# Altium PCB RPI-SENSORS.PcbDoc
Units mil, origin at the board's own origin, x right, y up, seen from the top; angles counter-clockwise.
Board outline 2228.74 x 2503.46 mil, 2 copper layers (Top Layer, Bottom Layer); 22 components, 20 nets, 103 pads, 0 vias.
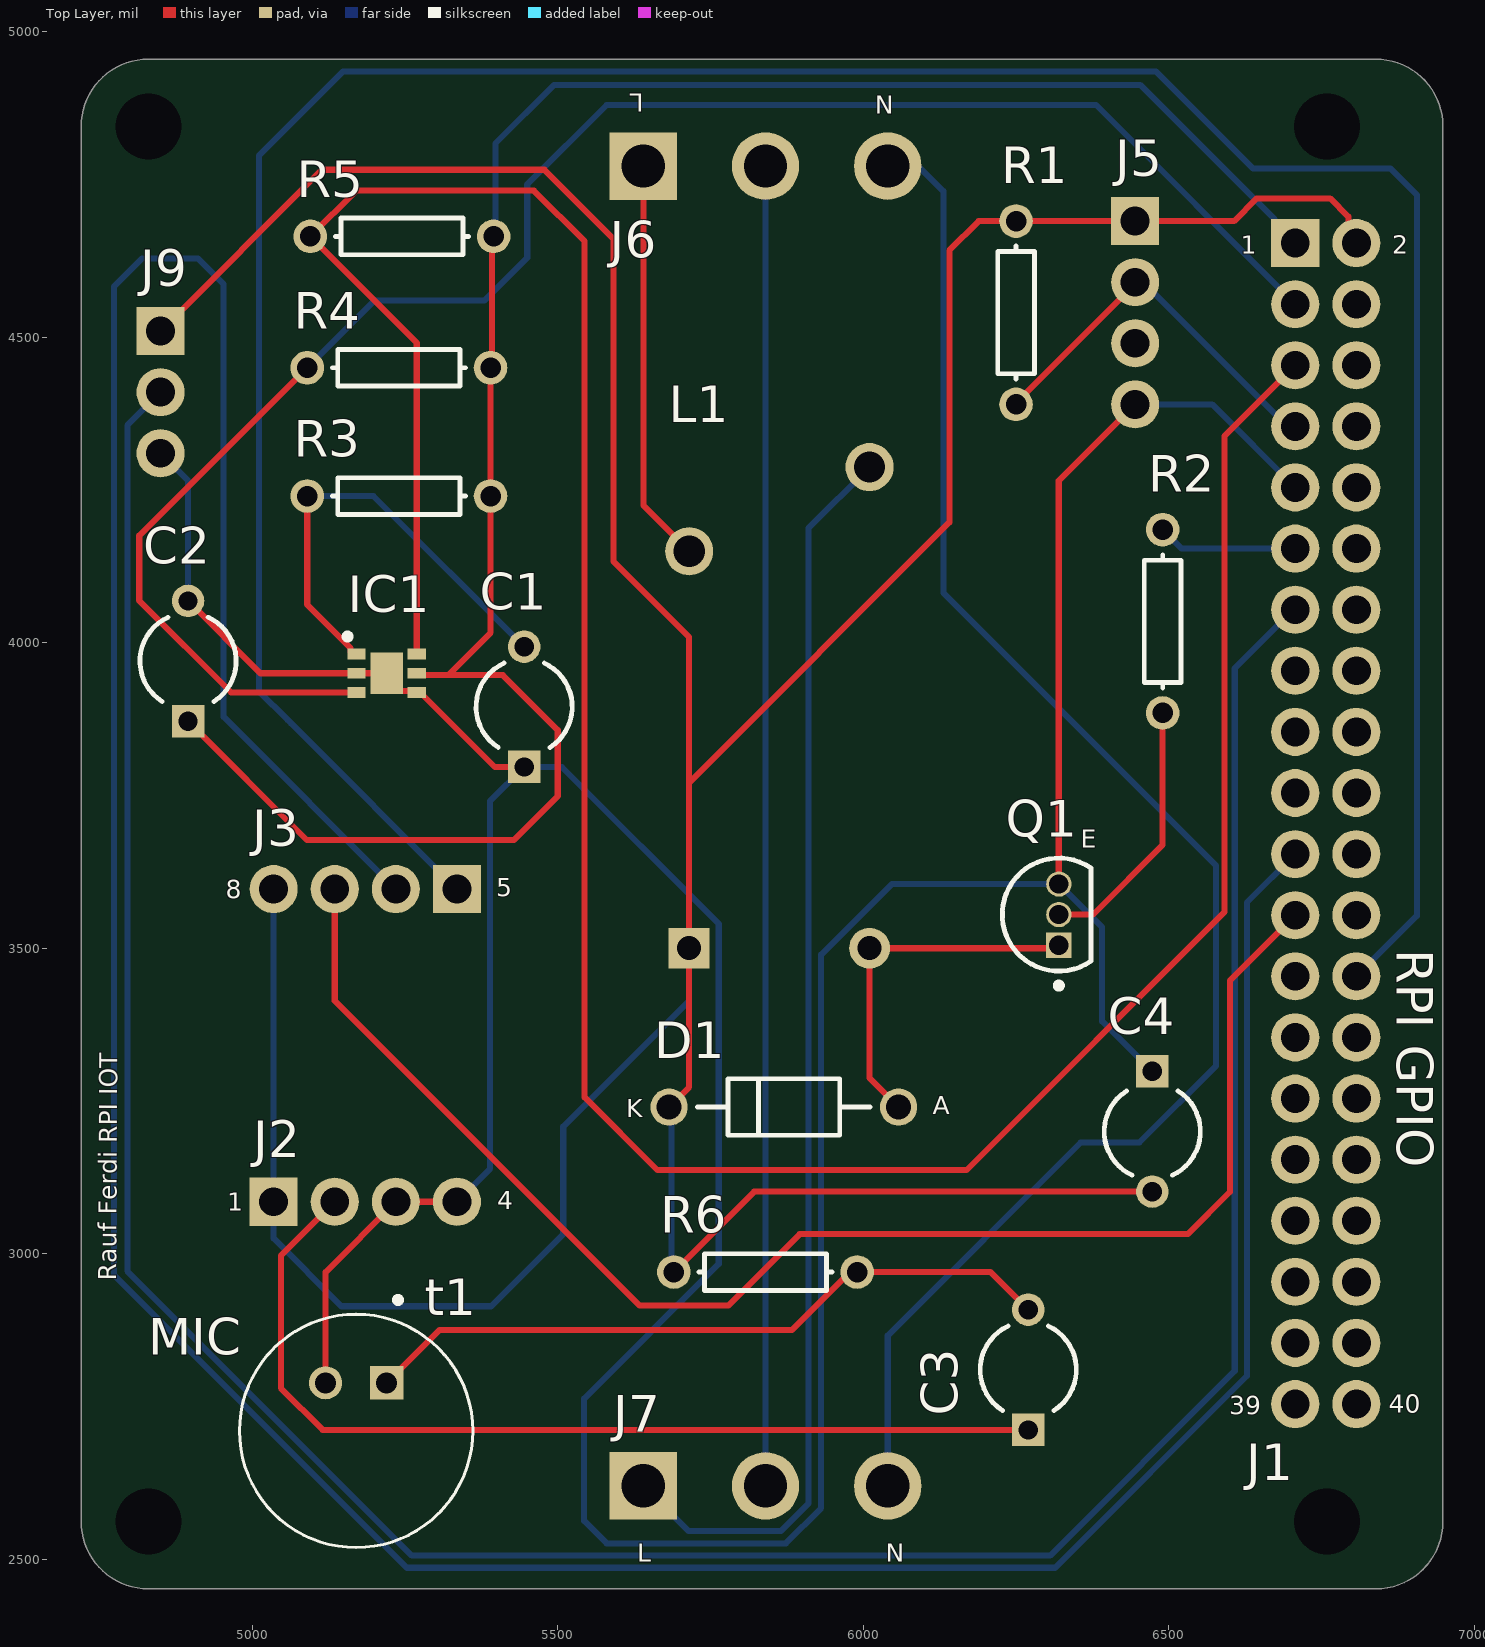
[diagram p0: Top Layer view]
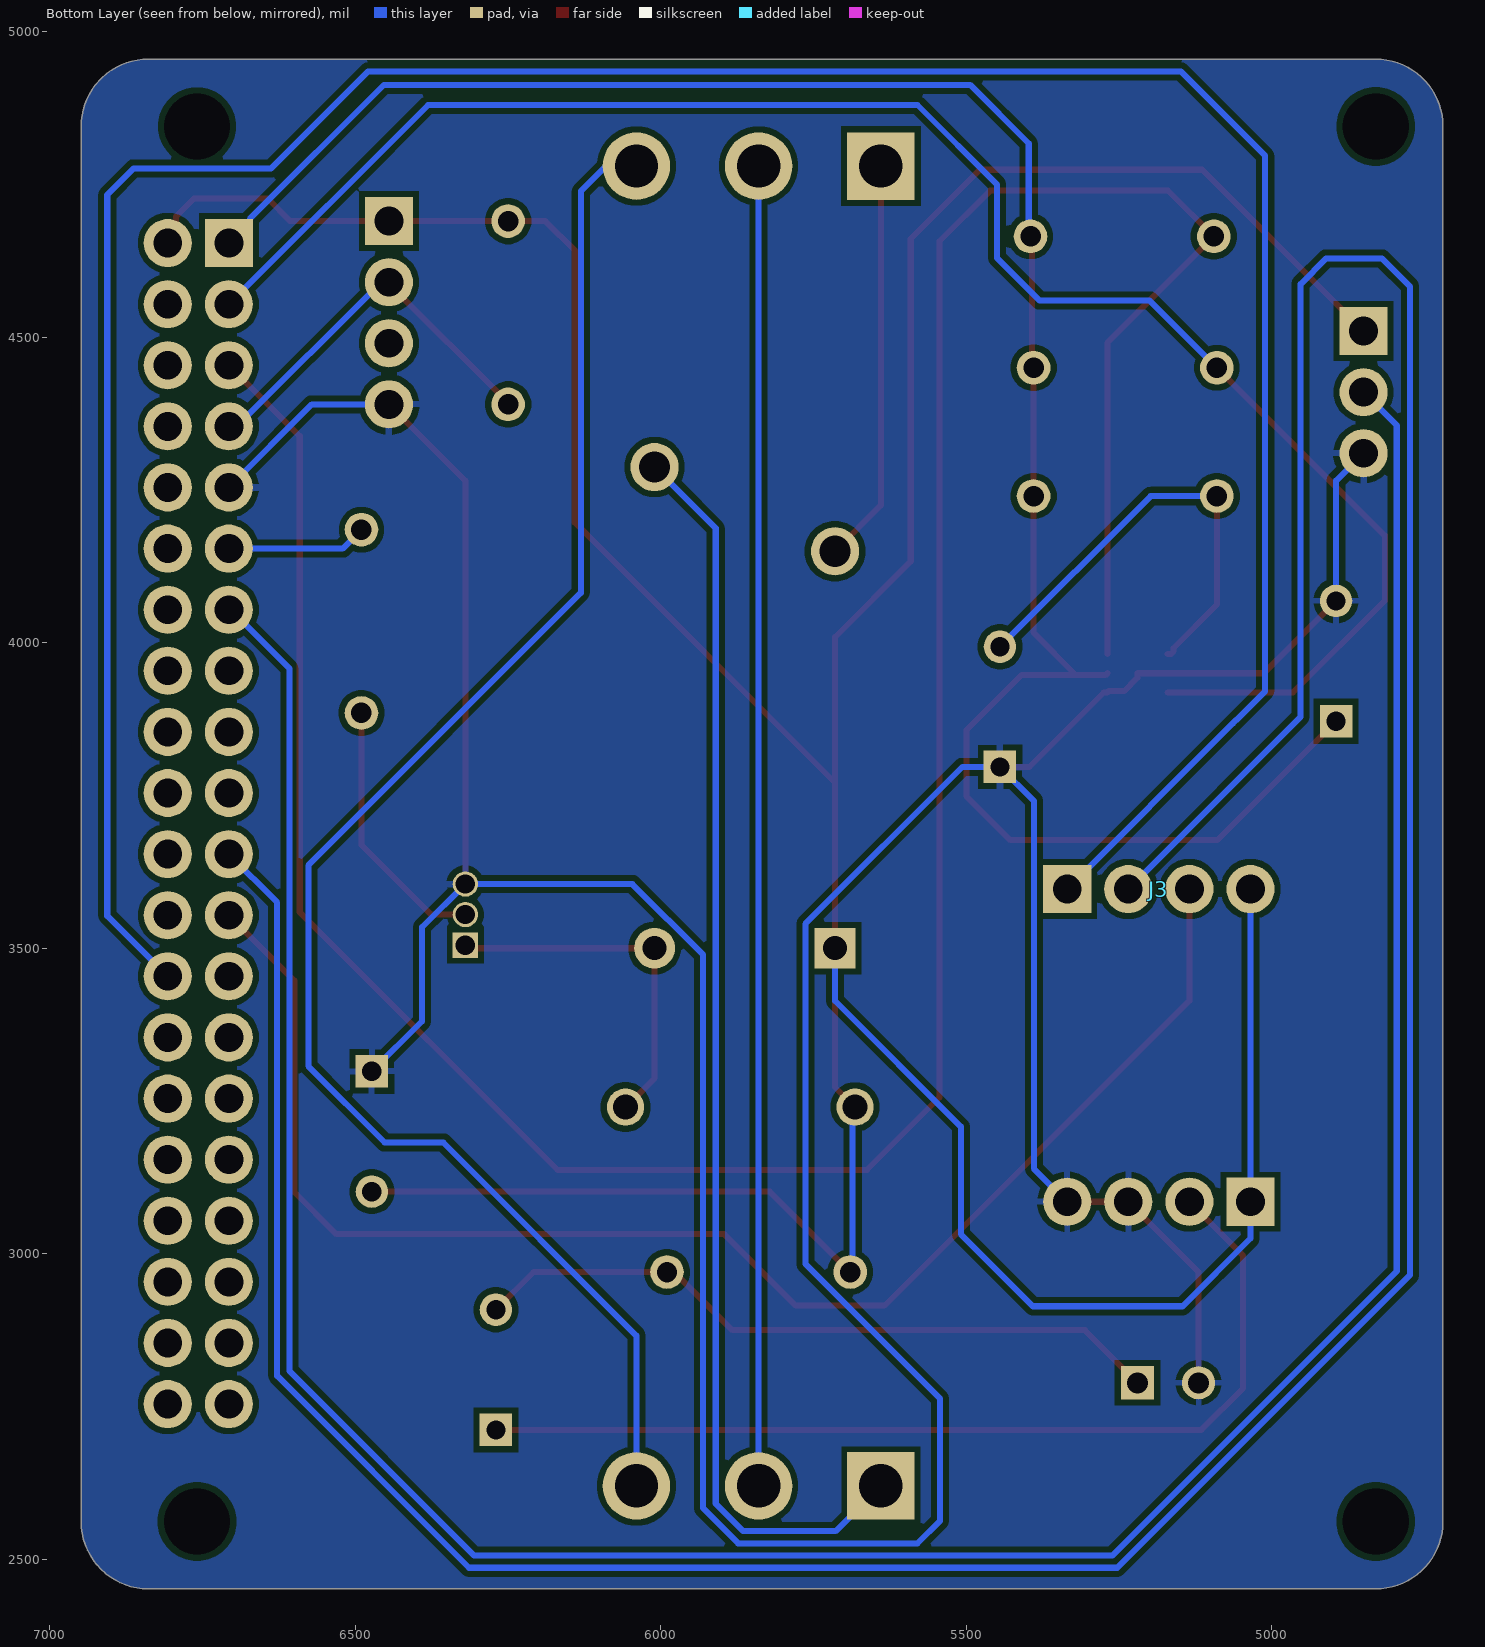
[diagram p1: Bottom Layer view, seen from below]

## Layer stack, top to bottom
Top Solder: solder mask 0.4, Solder Resist, Dk 3.5
Top Layer: signal copper 1.4
Dielectric 1: dielectric 12.6, FR-4, Dk 4.8
Bottom Layer: signal copper 1.4
Bottom Solder: solder mask 0.4, Solder Resist, Dk 3.5

## Board outline
4720,2561.54 ccw(c4830,2561.53) 4830,2451.54 6838.74,2451.54 ccw(c6838.74,2561.54) 6948.74,2561.54 6948.74,4845 ccw(c6838.87,4845.13) 6838.74,4955 4830,4955 ccw(c4829.99,4845) 4720,4845

## Design rules (kind name [scope] priority, off if disabled: settings)
Clearance [All] p1: gap=10 ignorepadtopadclearanceinfootprint=FALSE except(0: Arc-Hole Track-Hole SMDPad-Hole THPad-Hole Via-Hole Fill-Hole Poly-Hole Region-Hole Text-Hole)
PolygonConnect [All] p1: connectstyle=Relief reliefconductorwidth=10 reliefentries=4 polygonreliefangle="90 Angle" airgapwidth=10
RoutingVias [All] p1: holewidth=28 width=50 viastyle="Through Hole" minholewidth=28 minwidth=50 maxholewidth=28 maxwidth=50
SolderMaskExpansion [All] p1: expansion=4 istentingtop=FALSE
Width [All] p1: maxlimit=10 minlimit=10 preferedwidth=10
30 further rules are at their usual default settings.

## Components (designator, comment, footprint, x,y, rotation, side; value= is the part's Value field where it differs from the comment)
C1 "" CAPR5-4X5 5445,3895 r90 top value=1µF
C2 "Cap2" CAPR5-4X5 4895,3970 r90 top value=1µF
C3 "" CAPR5-4X5 6270,2810 r90 top value=1µF
C4 "" CAPR5-4X5 6473,3200 r270 top value=1µF
D1 "1N4007G" ONSC-AXIAL_LEAD-2-59-10_P 5870,3240 r0 top
IC1 "SGP40-D-R4" SON80P244X244X95-7N 5220,3950 r0 top
J1 "RPI-Header" RPI-Header 6707,4654 r0 top
J2 "ADC-SPI" 4x1 5035,3085 r90 top
J3 "ADC-SPI2" 4x1 5335,3596.81 r90 bottom
J5 "DHT11" 4x1 6445,4690 r0 top
J6 "3x1-Terminal" 3x1-Terminal 5640,4780 r90 top
J7 "3x1-Terminal" 3x1-Terminal 5640,2620 r90 top
J9 "PIR" 3x1 4850,4510 r0 top
L1 "Relais" Relais 5715,3500 r90 top
MIC "CMA-4544PF-W" MIC_CMA-4544PF-W 5170,2710 r90 top
Q1 "P2N2222AG" ONSC-TO-92-3-29-11 6320,3555 r90 top
R1 "10k" AXIAL-0.3 6250,4540 r270 top value=1K
R2 "1.2k" AXIAL-0.3 6490,4035 r90 top value=1K
R3 "4.7k" AXIAL-0.3 5240,4240 r180 top value=1K
R4 "10k" AXIAL-0.3 5240,4450 r0 top value=1K
R5 "10k" AXIAL-0.3 5245,4665 r0 top value=1K
R6 "2.2k" AXIAL-0.3 5840,2970 r0 top value=1K

## Footprints (in the part's own frame and the unit in brackets; to place one, negate y for a bottom-side part, rotate by r counter-clockwise, add the part's x,y. Pads: shape width x height; smd on the part's side, far side on the other; paste and mask are expansions set on the pad)
3x1 [mm]
  rect 2x2 hole 1.2: 1(0,0)
  round 2 hole 1.2: 2(0,-2.54) 3(0,-5.08)
3x1-Terminal [mm]
  rect 2.8x2.8 hole 1.8: 1(0,0)
  round 2.8 hole 1.8: 2(0,-5.08) 3(0,-10.16)
4x1 [mm]
  rect 2x2 hole 1.2: 1(0,0)
  round 2 hole 1.2: 2(0,-2.54) 3(0,-5.08) 4(0,-7.62)
AXIAL-0.3 [mm] "Axial Device, Thru-Hole; 2 Leads; 0.3 in Pin Spacing"
  round 1.4 hole 0.85: 1(-3.81,0) 2(3.81,0)
  silkscreen extent -2.77,-0.76 2.77,0.76
CAPR5-4X5 [mm] "Capacitor; 2 Leads"
  rect 1.35x1.35 hole 0.8: 1(-2.5,0)
  round 1.35 hole 0.8: 2(2.5,0)
  silkscreen extent -1.69,-2 1.82,2
MIC_CMA-4544PF-W [mm]
  rect 1.378x1.378 hole 0.87: 1(2,-1.27)
  round 1.378 hole 0.87: 2(2,1.27)
  silkscreen extent -4.85,-4.85 5.54,4.85
ONSC-AXIAL_LEAD-2-59-10_P [mm] "AXIAL, 2-Leads, Diameter 2.35mm"
  round 1.55 hole 1.05: 1(-4.77,0) 2(4.77,0)
  silkscreen extent -3.59,-1.17 3.59,1.17
ONSC-TO-92-3-29-11 [mm] "TO, 3-Leads, Body Dia 4.7mm, Pitch 1.27mm"
  rect 1.05x1.05 hole 0.8: 1(-1.27,0)
  round 1.05 hole 0.8: 2(0,0) 3(1.27,0)
  silkscreen extent -3.07,-1.34 2.35,2.35, body extent -2.35,-1.33 2.36,2.36, height 7.87
Relais [mm]
  rect 1.7x1.7 hole 1: 1(0,0)
  round 2 hole 1.3: 2(16.5,0) 3(20,-7.5)
  round 1.7 hole 1: 4(0,-7.5)
RPI-Header [mm]
  rect 2x2 hole 1.2: 1(0,0)
  round 2 hole 1.2: 2(2.54,0) 3(0,-2.54) 4(2.54,-2.54) 5(0,-5.08) 6(2.54,-5.08) 7(0,-7.62) 8(2.54,-7.62) 9(0,-10.16) 10(2.54,-10.16) 11(0,-12.7) 12(2.54,-12.7) 13(0,-15.24) 14(2.54,-15.24) 15(0,-17.78) 16(2.54,-17.78) 17(0,-20.32) 18(2.54,-20.32) 19(0,-22.86) 20(2.54,-22.86) 21(0,-25.4) 22(2.54,-25.4) 23(0,-27.94) 24(2.54,-27.94) 25(0,-30.48) 26(2.54,-30.48) 27(0,-33.02) 28(2.54,-33.02) 29(0,-35.56) 30(2.54,-35.56) 31(0,-38.1) 32(2.54,-38.1) 33(0,-40.64) 34(2.54,-40.64) 35(0,-43.18) 36(2.54,-43.18) 37(0,-45.72) 38(2.54,-45.72) 39(0,-48.26) 40(2.54,-48.26)
SON80P244X244X95-7N [mm]
  rect 0.75x0.45 smd: 1(-1.25,0.8) 2(-1.25,0) 3(-1.25,-0.8) 4(1.25,-0.8) 5(1.25,0) 6(1.25,0.8)
  rect 1.35x1.74 smd: 7(0,0)
  silkscreen extent -1.75,1.4 -1.5,1.65, body extent -1.27,-1.22 1.27,1.22, height 0.95

## Part data
C1 C3 C4: library part Cap2, "Capacitor", PackageDescription="Capacitor; 2 Leads", PackageReference=CAPR5-4X5, Published=23-Sep-2002, Publisher="Altium Limited"
C2: "Capacitor", PackageDescription="Capacitor; 2 Leads", PackageReference=CAPR5-4X5, Published=23-Sep-2002, Publisher="Altium Limited"
D1: library part CMP-0902-00143-1, "Standard Recovery Rectifier, 2-Pin Axial_Lead, Pb-Free, Bulk Bag", Manufacturer="On Semiconductor", ComponentLink1Description="Manufacturer URL", ComponentLink1URL=http://www.onsemi.com/, ComponentLink2Description=Datasheet, ComponentLink2URL=http://www.onsemi.com/pub_link/Collateral/1N4001-D.PDF, ComponentLink3Description="Package Specification", ComponentLink3URL=http://www.onsemi.cn/pub_link/Collateral/59-10.PDF, DatasheetVersion="Rev. 13", IFSM Max (A)=30, IO(rec) Max (A)=1, Mounting Technology="Through Hole", PackageDescription="2-Pin, Axial Lead, Diameter 2.35 mm", PackageReference=AXIAL_LEAD-2-59-10, PackageVersion="Rev. U, 02/2005", Packing="Bulk Bag", PartNumber=1N4007G, RoHS=TRUE, Type="Standard Recovery", VRRM Max (V)=1000
IC1: "Integrated Circuit", Manufacturer_Name=Sensirion, Mouser Part Number=403-SGP40-D-R4, Arrow Part Number=SGP40-D-R4, Arrow Price/Stock=https://www.arrow.com/en/products/sgp40-d-r4/sensirion-ag?region=nac, Datasheet Link=https://www.mouser.com/datasheet/2/682/Sensirion_Gas_Sensors_SGP40_Datasheet-1888696.pdf, Height=0.95mm, Manufacturer_Part_Number=SGP40-D-R4, Mouser Price/Stock=https://www.mouser.co.uk/ProductDetail/Sensirion/SGP40-D-R4?qs=yqaQSyyJnNgaRqiZfsbS1Q%3D%3D
J2 J3 J5: library part 4x1
J9: library part 3x1
MIC: "CMA Series 9.7 mm Electret Condenser Omni-Directional Pin Mount 3 V Microphone", Package=None, Availability=Unavailable, MP=CMA-4544PF-W, Price=None
Q1: library part CMP-1048-01402-1, "Amplifier Transistor, NPN Silicon, 3-Pin TO-92, Pb-Free, Bulk Box", Manufacturer="On Semiconductor", ComponentLink1Description="Manufacturer URL", ComponentLink1URL=http://www.onsemi.com/, ComponentLink2Description=Datasheet, ComponentLink2URL=http://www.onsemi.com/pub_link/Collateral/P2N2222A-D.PDF, ComponentLink3Description="Package Specification", ComponentLink3URL=http://www.onsemi.cn/pub_link/Collateral/2N6426-D.PDF, DatasheetVersion="Rev. 7", fT Min (MHz)=300, IC Continuous (A)=0.6, Mounting Technology="Through Hole", PackageDescription="3-Pin Transistor Outline, Body 4.825 x 3.685 mm, Pitch 1.27 mm", PackageReference=TO-92-3-29-11_AM_SL, PackageVersion="Rev. AM", Packing="Bulk Box", PartNumber=P2N2222AG, Polarity=NPN, RoHS=TRUE
R1 R2 R3 R4 R5 R6: library part Res1, "Resistor", LatestRevisionDate=17-Jul-2002, LatestRevisionNote="Re-released for DXP Platform.", PackageDescription="Axial Device, Thru-Hole; 2 Leads; 0.3 in Pin Spacing", PackageReference=AXIAL-0.3, Published=8-Jun-2000, Publisher="Altium Limited"

## Free pads (board coordinates)
  round 60 hole 108.27: ""(4830,2561.54) ""(4830,4845) ""(6759.13,2561.54) ""(6759.13,4845)

## Nets (pads, with @x,y where several pads share a name; then routed paths per layer and width w, separated by ;. In a path a pad name is that pad's centre, name@x,y a point inside that pad or via, vN(x,y) a via of type N, cw(c..) or ccw(c..) an arc to the next point about the centre after c; other vN are vias at no path point)
NetC1_1: C1.1 C2.2 C4.1 IC1.2 IC1.4 IC1.7 J1.9 J2.3 J2.4 J5.4 J9.3 MIC.2 Q1.3 | length 6916.4
  Top Layer w10: C2.2 5013.43,3950 IC1.2 IC1.7 5220,3942.32 5241.57,3920.75 5266.97,3920.75 IC1.4 5275.12,3918.5 5397.05,3796.57 C1.1 ; MIC.2 5120,2970 J2.3 J2.4 ; Q1.3 6320,4265 J5.4
  Bottom Layer w10: J9.3 4895,4265 C2.2 ; J2.4 5389.37,3139.37 5389.37,3740.95 C1.1 5506.57,3796.57 5763.46,3539.68 5763.46,2983.28 5543,2762.81 5543,2563 5580,2526 5873.45,2526 5931,2583.55 5931,3489.26 6046.74,3605 Q1.3 6320.44,3605 6390.94,3534.5 6390.94,3380.48 C4.1 ; J5.4 6571,4390 J1.9
NetC1_2: C1.2 IC1.1 R3.2 | length 794.5
  Top Layer w10: R3.2 5090,4062.28 5161.02,3991.26 5161.02,3985.35 5164.88,3981.5 IC1.1
  Bottom Layer w10: R3.2@5111.1,4243.8 5110.22,4243.64 R3.2 5198.43,4240 C1.2 C1.2@5441.36,4013.65
NetC2_1: C2.1 IC1.5 J1.1 R3.1 R4.2 R5.2 | length 3453.9
  Top Layer w10: C2.1 5089.57,3677 5428,3677 5500,3749 5500,3857 5410,3947 5320.57,3947 ; IC1.5 5272.21,3947 5320.57,3947 ; R5.2 5392.5,4662.5 5392.5,4452.5 R4.2 R3.1 5390,4016.43 5320.57,3947
  Bottom Layer w10: R5.2 5398,4668 5398,4817 5494,4913 6453.14,4913 6672.63,4693.51 6672.63,4688.37 J1.1
NetC3_1: C3.1 J2.2 | length 1592.8
  Top Layer w10: J2.2 5047,2997 5047,2780 5115.43,2711.57 C3.1
NetC3_2: C3.2 MIC.1 R6.2 | length 1150.6
  Top Layer w10: MIC.1 5306.26,2875 5883,2875 5978,2970 R6.2 6208.43,2970 C3.2
NetC4_2: C4.2 D1.1 J1.2 J2.1 J3.4 J5.1 J9.1 L1.1 R1.1 R6.1 | length 6984.3
  Top Layer w10: J9.1 5114,4774 5478,4774 5591,4661 5591,4133 5715,4009 5715,3771 ; D1.1 5715,3272.8 L1.1 5715,3771 ; R6.1 5821.57,3101.57 C4.2 ; J1.2 6793.85,4667.15 6793.85,4697.15 6764,4727 6643.79,4727 6606.79,4690 J5.1 R1.1 6189,4690 6141,4642 6141,4197 5715,3771
  Bottom Layer w10: J3.4 J2.1 5035,3025 5146,2914 5391,2914 5509,3032 5509,3208 5715,3414 L1.1 ; D1.1 5686.1,3236.1 5686.1,2973.9 R6.1
NetD1_2: D1.2 L1.4 Q1.1 | length 591.5
  Top Layer w10: D1.2 6010.28,3287.52 L1.4 6315,3500 Q1.1
NetIC1_3: IC1.3 J1.3 R4.1 | length 2913.4
  Top Layer w10: R4.1 4815.14,4175.14 4815.14,4068.86 4965.5,3918.5 IC1.3
  Bottom Layer w10: R4.1 5200,4560 5380,4560 5450,4630 5450,4750 5580,4880 6381,4880 J1.3
NetIC1_6: IC1.6 J1.5 R5.1 | length 4885.2
  Top Layer w10: IC1.6 5269.21,4490.79 R5.1 5170,4740 5461,4740 5544,4657 5544,3256 5663,3137 6169,3137 6591,3559 6591,4338 J1.5
NetJ1_7: J1.7 J5.2 R1.2 | length 666.5
  Top Layer w10: R1.2 6250,4392.5 6445,4587.5 J5.2 J5.2@6458,4590 ; J1.7@6694,4354 J1.7
  Bottom Layer w10: J5.2 6458,4590 6694,4354 J1.7
NetJ1_11: J1.11 R2.2 | length 244.7
  Top Layer w10: J1.11@6692.11,4154 J1.11
  Bottom Layer w10: R2.2 6521,4154 J1.11
NetJ1_13: J1.13 J9.2 | length 4879.8
  Bottom Layer w10: J9.2 4795.63,4355.63 4795.63,2971.65 5261.28,2506 6305.72,2506 6608,2808.28 6608,3958 6704,4054 J1.13
NetJ1_21: J1.21 J3.2 | length 6009.6
  Bottom Layer w10: J3.2 4953,3878.81 4953,4587 4911,4629 4820,4629 4774,4583 4774,2965 5253,2486 6314,2486 6628,2800 6628,3575 J1.21
NetJ1_23: J1.23 J3.3 | length 2428.9
  Top Layer w10: J3.3 5135,3414 5634,2915 5779,2915 5896,3032 6531,3032 6600,3101 6600,3447 J1.23
NetJ1_26: J1.26 J3.1 | length 4690.4
  Bottom Layer w10: J3.1 5063.81,3868 5058.1,3873.72 5057.86,3873.72 5011,3920.57 5011,4797 5149,4935 6479,4935 6638.13,4775.87 6863.13,4775.87 6906,4733 6906,3553 J1.26
NetJ6_1: J6.1 L1.2 | length 661.5
  Top Layer w10: J6.1 5640,4224.61 L1.2
NetJ6_2: J6.2 J7.2 | length 2160
  Bottom Layer w10: J7.2 J6.2
NetJ6_3: J6.3 J7.3 | length 2690.4
  Bottom Layer w10: J7.3 6040,2866 6356,3182 6452,3182 6577,3307 6577,3635.59 6131,4081.59 6131,4739 6090,4780 J6.3
NetJ7_1: J7.1 L1.3 | length 2057.3
  Bottom Layer w10: J7.1 5714,2546 5865.16,2546 5910.12,2590.96 5910.12,4187.24 L1.3
NetQ1_2: Q1.2 R2.1 | length 433.2
  Top Layer w10: Q1.2 6376,3555 6490,3669 R2.1
pads on no net: J1.4 J1.6 J1.8 J1.10 J1.12 J1.14 J1.15 J1.16 J1.17 J1.18 J1.19 J1.20 J1.22 J1.24 J1.25 J1.27 J1.28 J1.29 J1.30 J1.31 J1.32 J1.33 J1.34 J1.35 J1.36 J1.37 J1.38 J1.39 J1.40 J5.3

## Polygon pours and split planes (outlines as drawn)
NetC1_1 on Bottom Layer "NETC1_1_L02_P001" (solid, pour order 1): 4720,4852.14 cw(c4830.63,4844.33) 4822.79,4954.96 6845.88,4954.97 cw(c6838.21,4844.45) 6948.73,4852.27 6948.71,2554.28 cw(c6838.19,2562.09) 6845.91,2451.56 4822.75,2451.56 cw(c4830.64,2562.16) 4720.04,2554.25

## Silkscreen, mask and mechanical layers (free items; w line width, h text height)
Top Overlay:
  text "L" at 5640.81,4898.27 h30 r180
  text "N" at 6050,4895 h30 r180
  text "1" at 6617.77,4636.19 h30
  text "2" at 6865.77,4636.19 h30
  text "J3" at 5000,3667 h60
  text "E" at 6356,3664 h30
  text "5" at 5399,3585 h30
  text "8" at 4957,3582 h30
  text "RPI GPIO" at 6873,3498 h60 r270
  text "A" at 6113.75,3228.43 h30
  text "K" at 5612,3223 h30
  text "4" at 5401,3073 h30
  text "1" at 4959,3070 h30
  text "Rauf Ferdi RPI IOT" at 4777.06,2956.06 h30 r89.68
  text "t1" at 5282,2899 h60
  text "40" at 6860,2740 h30
  text "39" at 6599,2737 h30
  text "L" at 5630,2496 h30
  text "N" at 6037,2496 h30